# Altium PCB Dash.PcbDoc
Units mil, origin at the board's own origin, x right, y up, seen from the top; angles counter-clockwise.
Board outline 3937.01 x 3149.61 mil, 2 copper layers (Top, Bottom); 18 components, 90 nets, 274 pads, 115 vias.
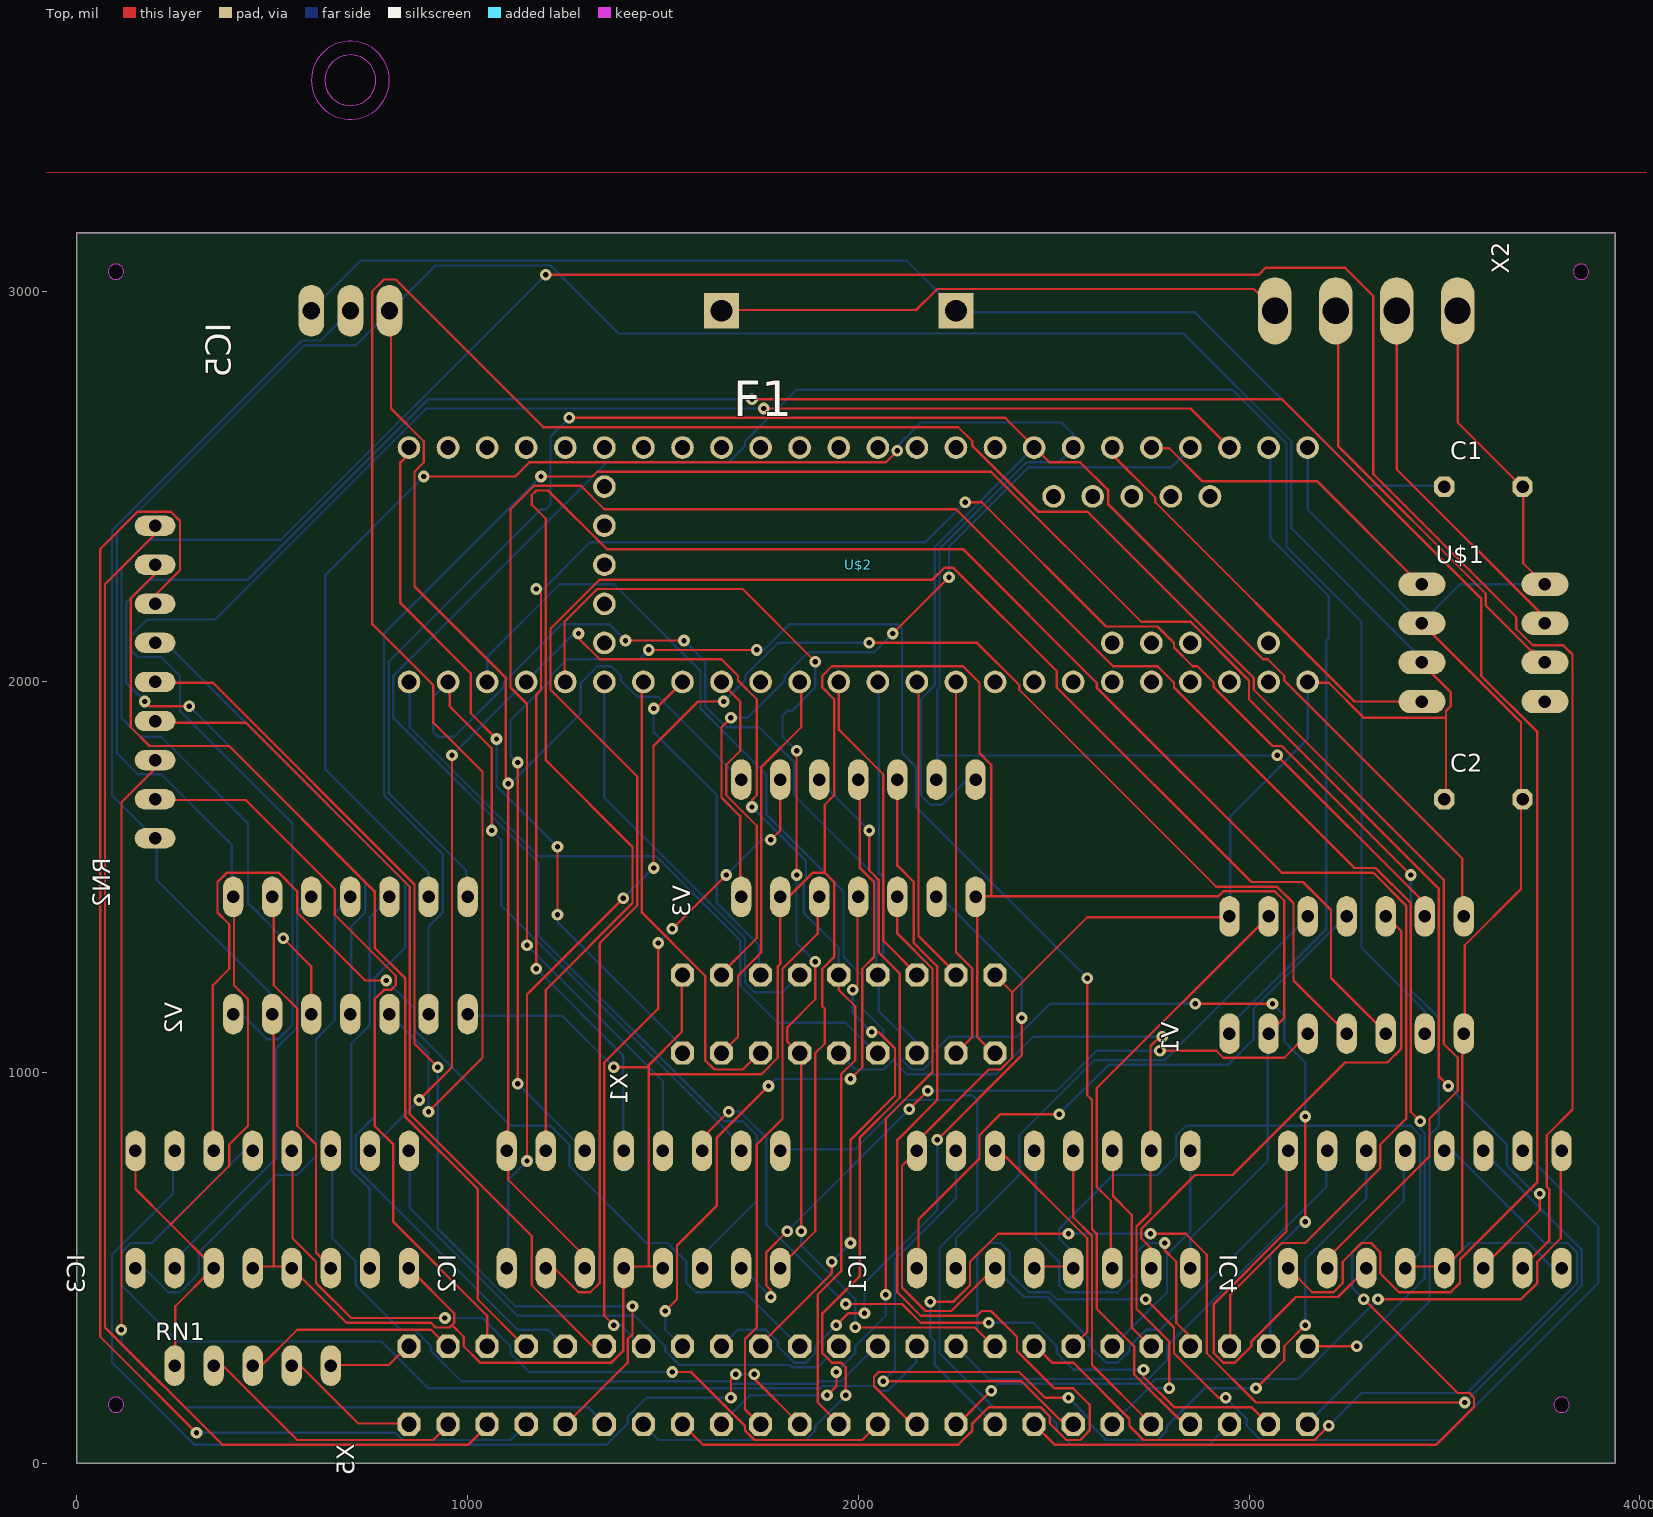
[diagram p0: Top view]
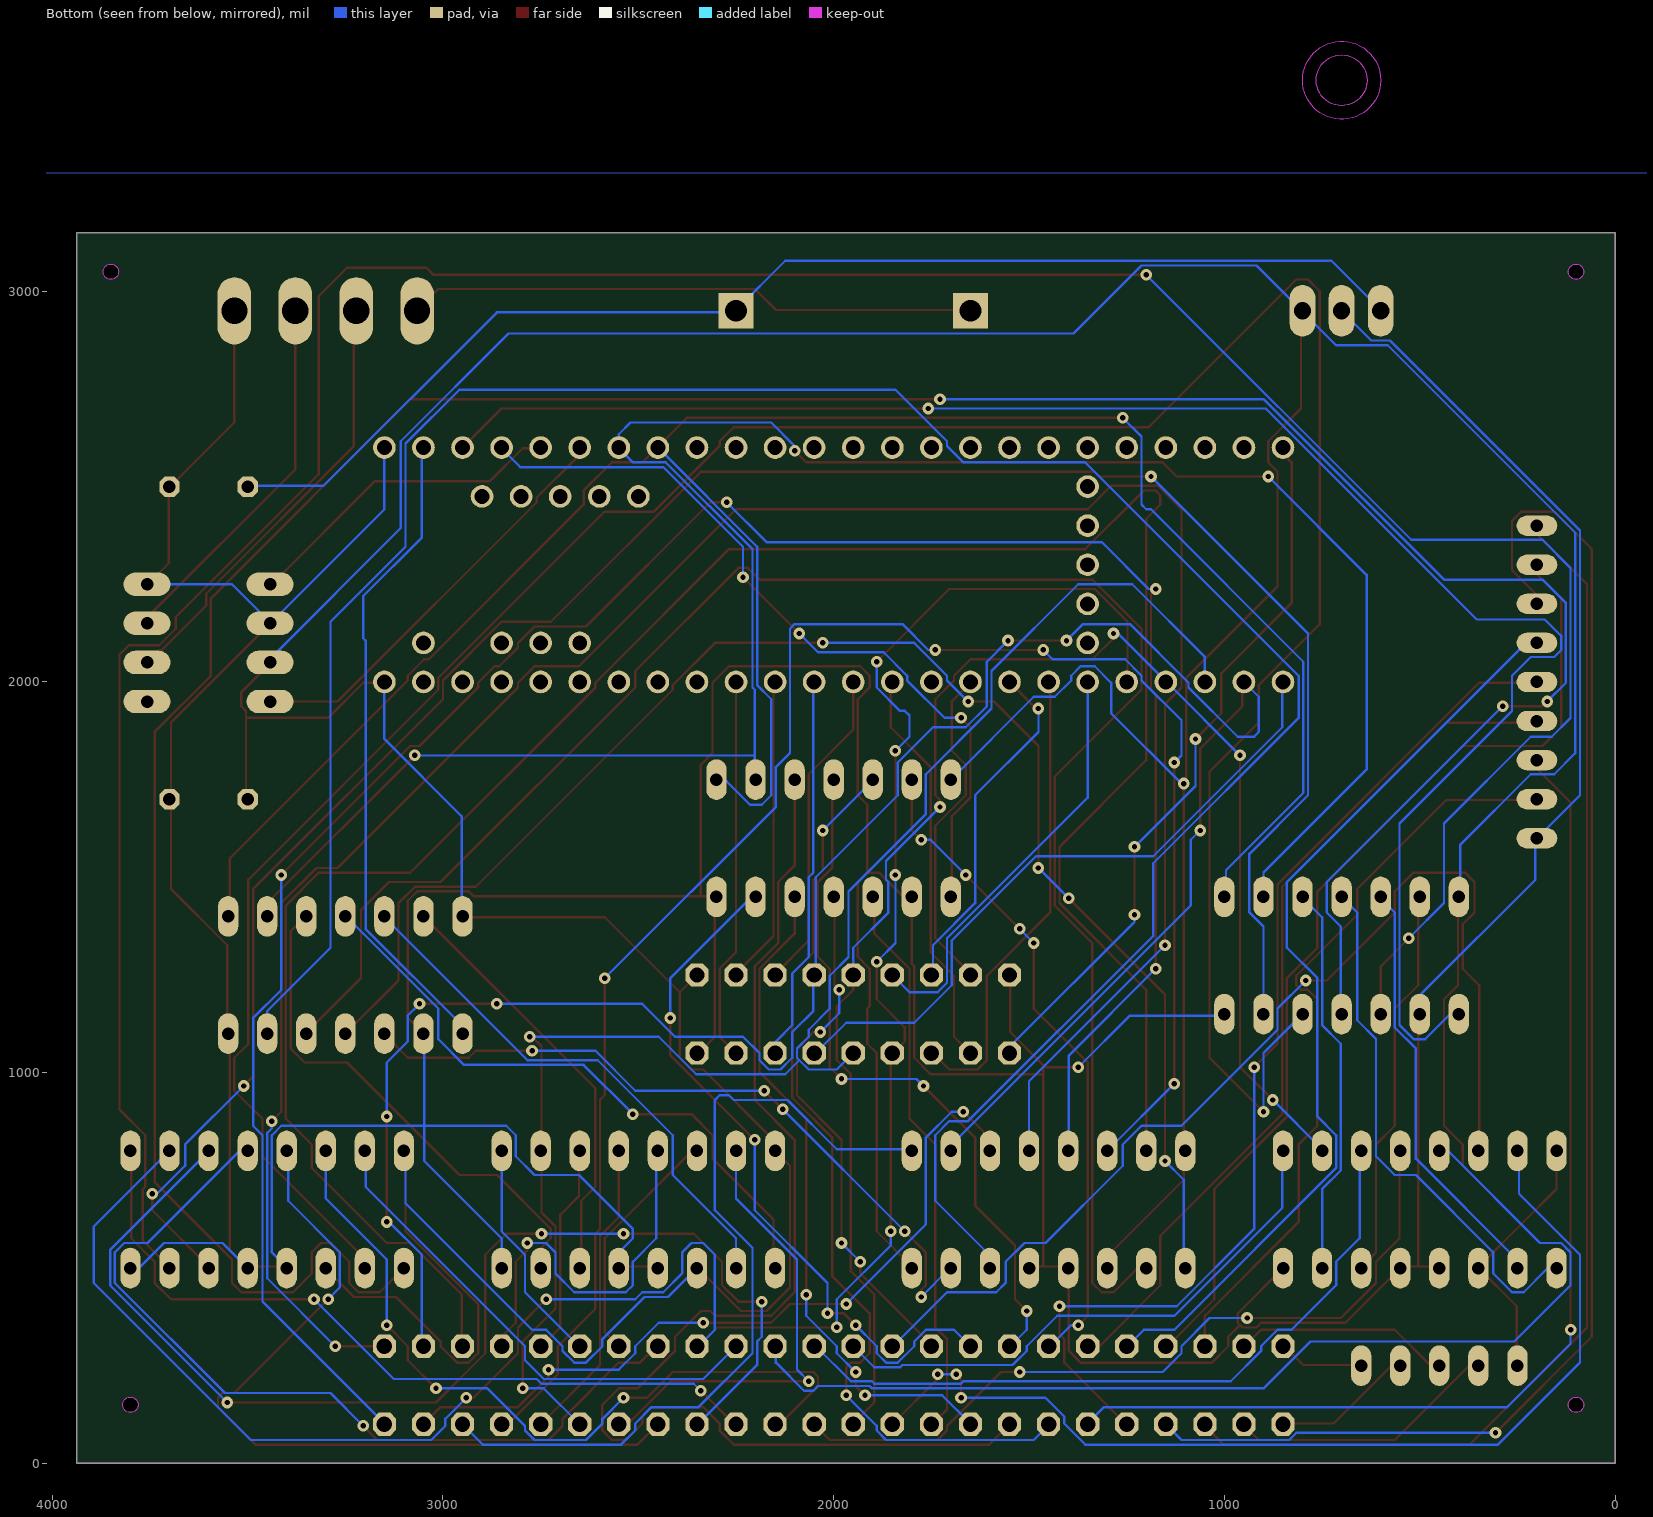
[diagram p1: Bottom view, seen from below]

## Layer stack, top to bottom
Top Solder: solder mask 0.4, Solder Resist, Dk 3.5
Top: signal copper 1.378
Dielectric 1: dielectric 12.6, FR-4, Dk 4.8
Bottom: signal copper 1.378
Bottom Solder: solder mask 0.4, Solder Resist, Dk 3.5

## Board outline
0,3149.61 0,0 3937.01,0 3937.01,3149.61
cut-out: 700,3475 ccw(c700,3540) 765,3540 ccw(c700,3540) 700,3605 ccw(c700,3540) 635,3540 ccw(c700,3540)
cut-out: 3850,3030.32 ccw(c3850,3050) 3869.68,3050 ccw(c3850,3050) 3850,3069.68 ccw(c3850,3050) 3830.32,3050 ccw(c3850,3050)
cut-out: 3800,130.31 ccw(c3800,150) 3819.68,150 ccw(c3800,150) 3800,169.69 ccw(c3800,150) 3780.32,150 ccw(c3800,150)
cut-out: 100,3030.32 ccw(c100,3050) 119.69,3050 ccw(c100,3050) 100,3069.68 ccw(c100,3050) 80.31,3050 ccw(c100,3050)
cut-out: 100,130.31 ccw(c100,150) 119.69,150 ccw(c100,150) 100,169.69 ccw(c100,150) 80.31,150 ccw(c100,150)

## Design rules (kind name [scope] priority, off if disabled: settings)
BoardOutlineClearance mdCopperDimension [All] p1: gap=10 ignorepadtopadclearanceinfootprint=FALSE except(0: Arc-SplitContinuation Track-SplitContinuation SMDPad-SplitContinuation THPad-SplitContinuation Via-SplitContinuation Fill-SplitContinuation Poly-SplitContinuation Region-SplitContinuation Text-SplitContinuation; 40: Poly-OutlineEdge Poly-CavityEdge Poly-CutoutEdge Poly-SplitBarrior)
Clearance "Clearance (Same Net)" [All] p1: gap=6 ignorepadtopadclearanceinfootprint=FALSE
Clearance [All] p2: gap=6 ignorepadtopadclearanceinfootprint=FALSE
HoleSize [All] p1: absolutevalues=TRUE maxlimit=100000 minlimit=13.78 maxpercent=80.000 minpercent=20.000
HoleToHoleClearance mdDrill [All] p1: gap=6 allowstackedmicrovias=TRUE
MinimumSolderMaskSliver [All] p1 off: minsoldermaskwidth=10
PasteMaskExpansion mlMinCreamFrame [All] p1: expansion=0
PolygonConnect PolygonConnect_For_PolygonThermal_ON_Width60000_Gap100000 [InPolygonClass('PolygonThermal_ON_Width60000_Gap100000') vs Not IsVia] p1: connectstyle=Relief reliefconductorwidth=6 reliefentries=4 polygonreliefangle="90 Angle" airgapwidth=10
PolygonConnect ThermalVias [IsVia] p2: connectstyle=Direct reliefconductorwidth=10 reliefentries=4 polygonreliefangle="90 Angle" airgapwidth=10
PolygonConnect [All] p3: connectstyle=Relief reliefconductorwidth=10 reliefentries=4 polygonreliefangle="90 Angle" airgapwidth=10
RoutingVias [All] p1: holewidth=13.78 width=29.78 viastyle="Through Hole" minholewidth=13.78 minwidth=29.78 maxholewidth=100 maxwidth=100
SolderMaskExpansion mlMinStopFrame [All] p1: expansion=4 istentingtop=FALSE
Width [All] p1: maxlimit=10 minlimit=6 preferedwidth=6
26 further rules are at their usual default settings.

## Classes and differential pairs
polygon class PolygonThermal_ON_Width60000_Gap100000: Polygon_1_Net_N$5 Polygon_1_Net_N$6

## Components (designator, comment, footprint, x,y, rotation, side; value= is the part's Value field where it differs from the comment)
C1 "10u" C050-024X044 3600,2500 r0 top
C2 "10u" C050-024X044 3600,1700 r0 top
F1 "FUSEBLANK_5X20MM" FUSE_HOLDER_5X20MM 1650,2950 r0 top
IC1 "74LS47N" DIL16 2500,650 r0 top
IC2 "74LS47N" DIL16 1450,650 r0 top
IC3 "74LS47N" DIL16 500,650 r0 top
IC4 "74LS47N" DIL16 3450,650 r0 top
IC5 "7805T" TO220H 700,3350 r0 top
RN1 "" SIL5 450,250 r0 top
RN2 "200" SIL9 200,2000 r90 top
U$1 "" MCP2561_PDIP 3600,2100 r0 top
U$2 "" TEENSY_3.5/3.6 2050,2300 r180 top
V1 "74164N" DIL14 3250,1250 r0 top
V2 "74164N" DIL14 700,1300 r0 top
V3 "74164N" DIL14 2000,1600 r0 top
X1 "TSW-109-08-G-Q" TSW-109-XX-G-Q 1950,1150 r0 top
X2 "" KK-156-4 3300,2950 r180 top
X5 "TSW-124-08-G-Q" TSW-124-XX-G-Q 2000,200 r0 top

## Footprints (in the part's own frame and the unit in brackets; to place one, negate y for a bottom-side part, rotate by r counter-clockwise, add the part's x,y. Pads: shape width x height; smd on the part's side, far side on the other; paste and mask are expansions set on the pad)
C050-024X044 [mil] "C050-024X044"
  oct 52x52 / inner round 48.04 / far side oct 52x52 hole 32: 1(-100,0) 2(100,0)
  body extent -124,-28 124,28, height 150
DIL14 [mil] "DIL14"
  oval 52x104 hole 32: 1(-300,-150) 2(-200,-150) 3(-100,-150) 4(0,-150) 5(100,-150) 6(200,-150) 7(300,-150) 8(300,150) 9(200,150) 10(100,150) 11(0,150) 12(-100,150) 13(-200,150) 14(-300,150)
  body extent -326,-202 326,202, height 50
DIL16 [mil] "DIL16"
  oval 52x104 hole 32: 1(-350,-150) 2(-250,-150) 3(-150,-150) 4(-50,-150) 5(50,-150) 6(150,-150) 7(250,-150) 8(350,-150) 9(350,150) 10(250,150) 11(150,150) 12(50,150) 13(-50,150) 14(-150,150) 15(-250,150) 16(-350,150)
  body extent -376,-202 376,202, height 50
FUSE_HOLDER_5X20MM [mil] "FUSE_HOLDER_5X20MM"
  rect 90x90 / inner round 83.15 / far side rect 90x90 hole 56: 1(0,0) 2(600,0)
  body extent -42,-42 642,42, height 50
KK-156-4 [mil] "KK-156-4"
  oval 86x172 hole 66.93: 1(-233.86,0) 2(-77.95,0) 3(77.95,0) 4(233.86,0)
  body extent -277,-86 277,86, height 50
MCP2561_PDIP [mil] "MCP2561_PDIP"
  oval 120x60 hole 32: CANH(157.48,50) CANL(157.48,-50) RXD(-157.48,-150) SPLIT(157.48,-150) STBY(157.48,150) TXD(-157.48,150) VDD(-157.48,-50) VSS(-157.48,50)
  body extent -218,-180 218,180, height 50
SIL5 [mil] "SIL5"
  oval 52x104 hole 32: 1(-200,0) 2(-100,0) 3(0,0) 4(100,0) 5(200,0)
  body extent -233,-52 226,52, height 150
SIL9 [mil] "SIL9"
  oval 52x104 hole 32: 1(-400,0) 2(-300,0) 3(-200,0) 4(-100,0) 5(0,0) 6(100,0) 7(200,0) 8(300,0) 9(400,0)
  body extent -433,-52 426,52, height 150
TEENSY_3.5/3.6 [mil] "TEENSY_3.5/3.6"
  round 58 hole 38: 0/RX(-1000,-300) 1/TX(-900,-300) 2(-800,-300) 3/CANTX(-700,-300) 3V3(300,-300) 3V3_2(700,-100) 3V3_LO(-900,300) 4/CANRX(-600,-300) 5(-500,-300) 6(-400,-300) 7(-300,-300) 8(-200,-300) 9/CS(-100,-300) 10/CS(0,-300) 11/MOSI(100,-300) 12/MISO(200,-300) 13/SCK(200,300) 14/A0(100,300) 15/A1(0,300) 16/A2(-100,300) 17/A3(-200,300) 18/A4/SDA(-300,300) 19/A5/SCL(-400,300) 20/A6(-500,300) 21/A7(-600,300) 21/DAC0(500,300) 22/A8(-700,300) 23/A9(-800,300) 24(400,-300) 25(500,-300) 26(600,-300) 27(700,-300) 28(800,-300) 29(900,-300) 30(1000,-300) 31/A12(1100,-300) 32/A13(1200,-300) 33/A14(1200,300) 34/A15(1100,300) 35/A16(1000,300) 36/A17(900,300) 37/A18(800,300) 38/A19(700,300) 39/A20(600,300) A10(-700,200) A11(-600,200) A22/DAC1(400,300) AGND(-1000,300) AREF(-800,200) GND(-1100,-300) GND2(300,300) GND3(700,0) PROG(700,100) RESET(700,200) U5V(-850,-175) UD+(-650,-175) UD-(-750,-175) UGND1(-550,-175) UGND2(-450,-175) VBAT(700,-200) VIN(-1100,300) VUSB(-1000,200)
  body extent -1129,-329 1229,329, height 50
TO220H [mil] "TO220H"
  oval 66x132 hole 44: 1(-100,-400) 2(0,-400) 3(100,-400)
  Top keep-out circle w0: c0,190 r100
  Bottom keep-out circle w0: c0,190 r100
  body extent -133,-466 133,290, height 150
TSW-109-XX-G-Q [mm] "TSW-109-XX-G-Q"
  oct 1.508x1.508 / inner round 1.393 / far side oct 1.508x1.508 hole 1: 1(10.16,-2.54) 2(10.16,2.54) 3(7.62,-2.54) 4(7.62,2.54) 5(5.08,-2.54) 6(5.08,2.54) 7(2.54,-2.54) 8(2.54,2.54) 9(0,-2.54) 10(0,2.54) 11(-2.54,-2.54) 12(-2.54,2.54) 13(-5.08,-2.54) 14(-5.08,2.54) 15(-7.62,-2.54) 16(-7.62,2.54) 17(-10.16,-2.54) 18(-10.16,2.54)
  body extent -10.86,-3.24 10.86,3.24, height 3.81
TSW-124-XX-G-Q [mm] "TSW-124-XX-G-Q"
  oct 1.508x1.508 / inner round 1.393 / far side oct 1.508x1.508 hole 1: 1(29.21,-2.54) 2(29.21,2.54) 3(26.67,-2.54) 4(26.67,2.54) 5(24.13,-2.54) 6(24.13,2.54) 7(21.59,-2.54) 8(21.59,2.54) 9(19.05,-2.54) 10(19.05,2.54) 11(16.51,-2.54) 12(16.51,2.54) 13(13.97,-2.54) 14(13.97,2.54) 15(11.43,-2.54) 16(11.43,2.54) 17(8.89,-2.54) 18(8.89,2.54) 19(6.35,-2.54) 20(6.35,2.54) 21(3.81,-2.54) 22(3.81,2.54) 23(1.27,-2.54) 24(1.27,2.54) 25(-1.27,-2.54) 26(-1.27,2.54) 27(-3.81,-2.54) 28(-3.81,2.54) 29(-6.35,-2.54) 30(-6.35,2.54) 31(-8.89,-2.54) 32(-8.89,2.54) 33(-11.43,-2.54) 34(-11.43,2.54) 35(-13.97,-2.54) 36(-13.97,2.54) 37(-16.51,-2.54) 38(-16.51,2.54) 39(-19.05,-2.54) 40(-19.05,2.54) 41(-21.59,-2.54) 42(-21.59,2.54) 43(-24.13,-2.54) 44(-24.13,2.54) 45(-26.67,-2.54) 46(-26.67,2.54) 47(-29.21,-2.54) 48(-29.21,2.54)
  body extent -29.91,-3.24 29.91,3.24, height 3.81

## Part data
C1 C2: library part C050-024X044, PackageName=C050-024X044
F1: library part FUSE_HOLDER_5X20MM, PackageName=FUSE_HOLDER_5X20MM
IC1 IC2 IC3 IC4: library part DIL16, PackageName=DIL16
IC5: library part TO220H, PackageName=TO220H
RN1: library part SIL5, PackageName=SIL5
RN2: library part SIL9, PackageName=SIL9
U$1: library part MCP2561_PDIP, PackageName=MCP2561_PDIP
U$2: library part TEENSY_3.5/3.6, PackageName=TEENSY_3.5/3.6
V1 V2 V3: library part DIL14, PackageName=DIL14
X1: library part TSW-109-XX-G-Q, PackageName=TSW-109-XX-G-Q
X2: library part KK-156-4, PackageName=KK-156-4
X5: library part TSW-124-XX-G-Q, PackageName=TSW-124-XX-G-Q

## Free pads (board coordinates)
  round 39.37 hole 39.37 unplated: MH1(100,3050) MH2(100,150) MH3(3800,150) MH4(3850,3050)
  round 130 hole 130 unplated: MH1(700,3540)

## Via types
v1: diameter 29.78/29.78 (per signal layer), hole 13.78, Top to Bottom, 115 vias

## Nets (pads, with @x,y where several pads share a name; then routed paths per layer and width w, separated by ;. In a path a pad name is that pad's centre, name@x,y a point inside that pad or via, vN(x,y) a via of type N, cw(c..) or ccw(c..) an arc to the next point about the centre after c; other vN are vias at no path point)
+5V: C2.1 IC1.3 IC1.16 IC2.3 IC2.16 IC3.3 IC3.16 IC4.3 IC4.16 IC5.3 RN1.1 U$1.VDD U$2.VIN V1.14 V2.14 V3.14 X1.2 | length 16091.1
  Top w6: IC3.16 150,702 240,612 ; RN1.1 252,252 252,402 IC3.3 348,504 240,612 ; V2.14 402,1446 402,1224 438,1188 438,864 390,816 390,762 240,612 ; IC5.3 804,2946 804,2700 888,2616 888,2562 864,2538 864,2244 1098,2010 1098,1746 v1(1104,1740) 1104,804 IC2.16 1104,798 1104,726 1296,534 1296,504 IC2.3 ; IC1.3 2346,498 2238,390 2172,390 2112,450 2112,762 IC1.16 2154,804 2154,828 2334,1008 2364,1008 2394,1038 2394,1206 ; X1.2 2394,1206 ; V1.14 2946,1398 2586,1398 2394,1206 ; IC4.16 3096,798 3096,594 2910,408 2910,282 2934,258 2964,258 3006,300 3006,312 3120,426 3228,426 3300,498 IC4.3 ; U$2.VIN 3150,1998 3204,1998 3294,1908 3504,1908 ; U$1.VDD 3444,2046 3516,1974 3516,1938 3504,1926 3504,1908 ; C2.1 3504,1704 3504,1908
  Bottom w6: V2.14 396,1452 396,1584 216,1764 156,1764 102,1818 102,2382 582,2862 714,2862 798,2946 IC5.3 804,2952 918,3066 1212,3066 1386,2892 2832,2892 3108,2616 3108,2394 3438,2064 3438,2052 U$1.VDD ; v1(1104,1740) 1110,1740 1290,1920 1290,1998 1332,2040 1368,2040 1392,2016 1392,2004 1434,1962 1488,1962 V3.14 ; IC1.3 2424,426 2484,426 2592,318 2592,300 2634,258 2664,258 2694,288 2694,300 2736,342 2772,342 3096,666 3096,798 IC4.16 ; V1.14 2952,1404 2952,1656 3150,1854 U$2.VIN
+12V: C1.1 F1.2 IC5.1 | length 3197.1
  Bottom w6: IC5.1 600,2952 726,3078 2124,3078 2250,2952 F1.2 2250,2946 2862,2946 3306,2502 3498,2502 C1.1
A1: IC2.13 X5.1 | length 5854.5
  Top w6: v1(1176,1266) 1176,1968 1188,1980 1188,2226 v1(1176,2238) ; v1(2274,2460) 2316,2460 2634,2142 2766,2142 2808,2100 2808,2088 2856,2040 2868,2040 2910,1998 2910,1986 3060,1836 3084,1836 v1(3414,1506)
  Bottom w6: v1(1176,1266) 1398,1044 1398,804 IC2.13 ; v1(1176,2238) 1194,2238 1314,2358 2172,2358 v1(2274,2460) ; X5.1 3150,102 3462,414 3462,840 3486,864 3486,1140 3414,1212 v1(3414,1506)
A2: IC1.13 X5.8 | length 1023.9
  Top w6: v1(2784,564) 2784,546 2814,516 2814,360 2850,324 X5.8
  Bottom w6: IC1.13 2454,798 2454,576 2514,516 2514,456 2532,438 2664,438 2712,486 2712,540 2736,564 v1(2784,564)
A3: IC3.13 X5.22 | length 2753.5
  Bottom w6: IC3.13 450,798 426,798 192,564 138,564 114,540 114,456 258,312 780,312 900,192 1902,192 1908,198 2040,198 2052,186 2076,186 2148,258 2148,300 X5.22
A4: IC4.13 X5.15 | length 2047.3
  Top w6: X5.15 2502,48 3480,48 3576,144 3576,168 3564,180 3534,180 v1(3294,420)
  Bottom w6: v1(3294,420) 3264,450 3264,540 3396,672 3396,798 IC4.13
A/VEE: U$2.13/SCK X1.15 | length 1037
  Top w6: X1.15 1692,1092 1692,1248 1752,1308 1752,1782 1854,1884 1854,1998 U$2.13/SCK
B1: IC2.12 X5.2 | length 5928.8
  Top w6: v1(1152,1326) 1152,1944 1110,1986 1110,2442 1170,2502 1290,2502 1350,2442 2250,2442 2652,2040 2766,2040 2808,1998 2808,1986 3270,1524 3324,1524 3414,1434 3414,900 v1(3438,876) ; X5.2 v1(3276,300)
  Bottom w6: v1(1152,1326) 1500,978 IC2.12 ; v1(3276,300) 3450,474 3450,846 3438,858 v1(3438,876)
B2: IC1.12 X5.9 | length 782.8
  Top w6: IC1.12 2550,630 2598,582 2598,252 X5.9
B3: IC3.12 X5.23 | length 2002.3
  Top w6: IC3.12 552,798 552,576 612,516 612,462 702,372 v1(942,372) ; v1(1524,234) 1572,234 1710,96 1710,84 1734,60 2010,60 X5.23
  Bottom w6: v1(942,372) 1038,372 1110,300 1110,282 1158,234 v1(1524,234)
B4: IC4.12 X5.16 | length 2191.8
  Top w6: X5.16 2454,300 2496,258 2550,258 2694,114 2694,96 2730,60 3168,60 v1(3204,96)
  Bottom w6: v1(3204,96) 3288,180 3558,180 3840,462 3840,540 3816,564 3756,564 3522,798 3504,798 IC4.12
B.L.: U$2.A22/DAC1 X1.16 | length 854.4
  Top w6: X1.16 1650,1254 1740,1344 1740,1632 1662,1710 1662,1788 1698,1824 1698,1950 1650,1998 U$2.A22/DAC1
C1: IC2.11 X5.3 | length 1992.3
  Top w6: IC2.11 1602,804 1602,834 v1(1668,900) ; v1(1968,408) 2112,408 2160,360 v1(2334,360) ; v1(2730,240) 2730,222 2808,144 3006,144 X5.3
  Bottom w6: v1(1668,900) 1698,900 1764,834 1764,612 v1(1968,408) ; v1(2334,360) 2448,360 2508,300 2508,282 2550,240 v1(2730,240)
C2: IC1.11 X5.10 | length 542.6
  Top w6: IC1.11 2652,798 2652,684 2700,636 2700,348 2748,300 X5.10
C3: IC3.11 X5.24 | length 1858.5
  Bottom w6: IC3.11 654,798 654,576 714,516 714,456 828,342 864,342 906,300 906,288 984,210 1668,210 1674,204 1896,204 1902,210 1956,210 2046,300 X5.24
C4: IC4.11 X5.17 | length 3058
  Top w6: v1(2184,414) 2244,414 2286,456 2286,516 2358,588 v1(2538,588) ; v1(2748,588) 2838,588 2892,534 2892,282 3018,156 v1(3552,156)
  Bottom w6: v1(2184,414) 2184,324 2196,312 2196,252 2346,102 X5.17 ; v1(2538,588) v1(2748,588) ; v1(3552,156) 3852,456 3852,546 3600,798 IC4.11
CAN_H: U$1.CANH X2.2 | length 956.8
  Top w6: X2.2 3378,2946 3378,2544 3756,2166 3756,2154 U$1.CANH
CAN_L: U$1.CANL X2.3 | length 1125.9
  Top w6: X2.3 3228,2946 3228,2604 3606,2226 3606,2196 3720,2082 3726,2082 3756,2052 U$1.CANL
CLK: U$2.6 V1.8 V2.8 V3.8 | length 5627.7
  Top w6: v1(1260,2676) 2376,2676 2448,2604 U$2.6 2454,2598 2490,2562 2568,2562 2640,2490 2640,2454 3036,2058 3048,2058 3090,2016 3090,2004 3546,1548 3546,1404 V1.8
  Bottom w6: V2.8 996,1452 996,1518 798,1716 798,2052 1188,2442 1200,2442 1212,2454 1212,2628 v1(1260,2676) ; V3.8 2298,1746 2274,1746 2214,1686 2184,1686 2160,1710 2160,1956 2196,1992 2196,2346 U$2.6
CONTRAST: U$2.17/A3 X1.3 | length 984.8
  Top w6: X1.3 2292,1092 2292,1266 2250,1308 U$2.17/A3
D0: U$2.33/A14 X1.7 | length 1727.1
  Bottom w6: U$2.33/A14 852,1998 852,1884 1182,1554 1482,1554 1698,1338 1698,1224 1794,1128 1968,1128 2046,1050 X1.7
D1: IC2.10 U$2.34/A15 X1.8 X5.4 | length 5793.5
  Top w6: U$2.34/A15 954,1998 954,1938 1062,1830 v1(1062,1620) ; v1(1404,2106) v1(1554,2106) ; v1(2862,1176) v1(3060,1176) ; v1(3144,618) v1(3144,888)
  Bottom w6: U$2.34/A15 912,1962 912,1872 924,1860 966,1860 1092,1986 1092,1998 1242,2148 1362,2148 v1(1404,2106) ; v1(1062,1620) 1086,1596 1086,1428 1698,816 1698,804 IC2.10 ; v1(1554,2106) 1608,2052 1608,1938 1662,1884 1746,1884 1836,1794 1836,1710 2046,1500 2046,1254 X1.8 2052,1248 2052,1158 2106,1104 2106,1038 2136,1008 2166,1008 2190,1032 2190,1050 2232,1092 2406,1092 2490,1176 v1(2862,1176) ; X5.4 3054,300 3054,534 3138,618 v1(3144,618) ; v1(3060,1176) 3090,1146 3090,1080 3144,1026 v1(3144,888)
D2: IC1.10 U$2.35/A16 X1.9 X5.11 | length 4044.8
  Top w6: v1(2778,1092) 2772,1092 2748,1068 2748,804 IC1.10 2748,798 2748,642 2712,606 2712,396 2796,312 v1(2796,192)
  Bottom w6: U$2.35/A16 1050,2064 1236,2250 1374,2250 1596,2028 1596,1932 1764,1764 1764,1662 1962,1464 1962,1296 2010,1248 2010,1164 2064,1110 2064,1092 2094,1062 2094,1038 2088,1032 ; X1.9 1992,1008 2064,1008 2088,1032 ; X5.11 2742,192 v1(2796,192) ; v1(2778,1092) 2448,1092 2352,996 2124,996 2088,1032
D3: IC3.10 U$2.36/A17 X1.10 X5.25 | length 4129.8
  Top w6: v1(876,930) 960,1014 v1(960,1812) ; v1(1284,2124) 1284,2112 1338,2058 1650,2058 1692,2016 1692,2004 1740,1956 1740,1710 1728,1698 v1(1728,1680) ; X5.25 1950,102 1896,156 1896,432 1956,492 1956,996 1992,1032 1992,1170 1950,1212 X1.10
  Bottom w6: IC3.10 750,804 v1(876,930) ; v1(960,1812) 1146,1998 U$2.36/A17 1152,2004 1272,2124 v1(1284,2124) ; v1(1728,1680) 1866,1542 1866,1494 1860,1488 1860,1410 1950,1320 X1.10
D4: IC4.10 U$2.37/A18 X1.11 X5.18 | length 5904.5
  Top w6: U$2.37/A18 1248,2004 1248,2154 1332,2238 1704,2238 v1(1890,2052) ; v1(1842,1506) v1(1842,1824) ; v1(1854,594) 1854,1050 X1.11 1848,1050 1818,1080 1818,1116 1890,1188 v1(1890,1284) ; v1(1992,348) 2298,348 2346,300 X5.18 ; v1(2736,420) 2808,348 2808,282 2922,168 v1(2940,168)
  Bottom w6: v1(1842,1506) 1842,1332 v1(1890,1284) ; v1(1842,1824) 1806,1860 1806,1914 1818,1926 1830,1926 1890,1986 v1(1890,2052) ; v1(1854,594) 1854,558 1992,420 v1(1992,348) ; X5.18 2346,300 2304,342 2304,534 2334,564 2364,564 2388,540 2388,486 2436,438 2490,438 2508,420 v1(2736,420) ; v1(2940,168) 2994,114 2994,96 3030,60 3492,60 3894,462 3894,606 IC4.10
D5: U$2.38/A19 X1.12 | length 1087.3
  Bottom w6: U$2.38/A19 1350,1704 1710,1344 1710,1230 1734,1206 1806,1206 X1.12
D6: U$2.39/A20 X1.13 | length 1206.9
  Top w6: U$2.39/A20 1446,1998 1446,1410 1608,1248 1608,1032 1632,1008 1704,1008 1746,1050 X1.13
D7: U$2.21/DAC0 X1.14 | length 897.7
  Top w6: v1(1476,1932) 1482,1932 U$2.21/DAC0
  Bottom w6: v1(1476,1932) 1476,1872 1638,1710 1638,1434 1746,1326 1746,1254 X1.14
E1: IC2.9 X5.5 | length 2128.9
  Bottom w6: IC2.9 1800,804 1992,804 2118,930 2256,930 2268,942 2292,942 2304,930 2304,648 2208,552 2208,282 2346,144 2466,144 2508,102 2508,84 2544,48 2898,48 X5.5
E2: IC1.9 X5.12 | length 584
  Bottom w6: X5.12 2652,300 2790,438 2790,534 2850,594 IC1.9
E3: IC3.9 X5.26 | length 1443.2
  Bottom w6: IC3.9 852,798 852,654 1128,378 1428,378 1506,300 1506,288 1542,252 1824,252 1830,246 1896,246 X5.26
E4: IC4.9 X5.19 | length 2007.3
  Top w6: X5.19 2250,96 v1(2340,186) ; v1(3330,420) 3696,420 3738,462 3738,516 3798,576 3798,798 IC4.9
  Bottom w6: v1(2340,186) 2358,204 2748,204 2760,216 3126,216 v1(3330,420)
ENABLE: U$2.14/A0 X1.6 | length 832.5
  Top w6: U$2.14/A0 1950,1878 2064,1764 2064,1338 2148,1254 X1.6
F1: IC2.15 X5.6 | length 5918.3
  Top w6: IC2.15 1200,1212 1422,1434 1422,1578 1200,1800 1200,2418 1164,2454 1164,2478 1176,2490 1206,2490 1356,2340 2268,2340 2610,1998 2610,1986 3084,1512 3318,1512 3402,1428 3402,882 3336,816 3336,756 3144,564 3084,564 2952,432 2952,300 X5.6
F2: IC1.15 X5.13 | length 1199.8
  Top w6: v1(2064,210) 2418,210 2526,102 2550,102 X5.13
  Bottom w6: v1(2064,210) 2094,240 2094,522 2250,678 IC1.15
F3: IC3.15 X5.27 | length 2629.3
  Top w6: v1(1674,168) 1674,216 v1(1686,228) ; v1(1734,228) 1734,216 X5.27
  Bottom w6: IC3.15 246,798 246,690 90,534 90,258 300,48 1356,48 1410,102 1410,120 1458,168 v1(1674,168) ; v1(1686,228) v1(1734,228)
F4: IC4.15 X5.20 | length 1300.5
  Bottom w6: X5.20 2334,216 2742,216 2790,264 2790,300 3198,708 3198,798 IC4.15
G1: IC2.14 X5.7 | length 4648.8
  Top w6: v1(1128,972) v1(1128,1794) ; v1(1464,2082) v1(1740,2082) ; v1(2586,1242) 2586,942 2598,930 2598,600 2610,588 2610,396 2706,300 2706,228 2832,102 2850,102 X5.7
  Bottom w6: v1(1128,972) IC2.14 ; v1(1128,1794) 1110,1812 1110,1902 1212,2004 1212,2016 1254,2058 1440,2058 v1(1464,2082) ; v1(1740,2082) 1758,2082 1824,2148 2100,2148 2112,2136 2112,1818 2148,1782 2148,1680 v1(2586,1242)
G2: IC1.14 X5.14 | length 619.7
  Top w6: IC1.14 2352,798 2364,798 2586,576 2586,336 X5.14
G3: IC3.14 X5.28 | length 2846.8
  Top w6: IC3.14 348,804 348,1224 390,1266 390,1380 360,1410 360,1488 384,1512 516,1512 564,1464 564,1410 738,1236 v1(792,1236)
  Bottom w6: v1(792,1236) 864,1164 864,1110 1110,864 1212,864 1260,816 1260,762 1458,564 1512,564 1560,516 1560,462 1584,438 1710,438 1848,300 X5.28
G4: IC4.14 X5.21 | length 2023.2
  Top w6: X5.21 2148,102 2136,102 2040,198 2040,222 2052,234 2412,234 2478,168 v1(2538,168) ; v1(3018,192) 3090,264 3090,300 v1(3144,354)
  Bottom w6: v1(2538,168) 2592,114 2592,102 2634,60 2766,60 2790,84 2790,96 2886,192 v1(3018,192) ; v1(3144,354) 3144,522 3300,678 IC4.14
GND: C1.2 C2.2 IC1.4 IC1.5 IC1.8 IC2.4 IC2.5 IC2.8 IC3.4 IC3.5 IC3.8 IC4.4 IC4.5 IC4.8 IC5.2 RN2.1 U$1.STBY U$1.VSS U$2.GND V1.2 V1.7 V2.2 V2.7 V3.2 V3.7 X1.1 X1.18 X2.1 | length 17243.2
  Top w6: IC3.4 450,504 504,504 ; V2.2 504,1146 504,504 ; IC3.8 966,384 966,360 960,354 ; v1(1374,1014) 1464,1014 ; IC2.5 1500,504 1464,504 ; X1.18 1548,1248 1548,1104 1464,1020 1464,1014 ; IC2.8 1800,504 1890,594 1890,1050 1914,1074 1914,1164 1908,1170 1908,1266 1938,1296 1938,1488 1914,1512 ; X1.1 2346,1050 2304,1092 2304,1446 V3.7 2304,1452 2340,1452 ; IC1.4 2454,504 2550,504 IC1.5 ; V1.2 3090,1140 3090,1440 3066,1464 2934,1464 2922,1452 2340,1452 ; IC4.4 3402,504 3498,504 IC4.5 3546,546 3546,1098 V1.7 3552,1104 3552,1326 3696,1470 3696,1698 C2.2 3696,1704 3696,1896 3444,2148 U$1.VSS ; X2.1 3534,2946 3534,2664 3696,2502 C1.2 3702,2496 3702,2304 3756,2250 U$1.STBY ; 504,504 546,504 IC3.5 690,360 906,360 918,348 954,348 960,354 ; 960,354 990,324 990,300 1032,258 1368,258 1398,288 1398,498 IC2.4 1404,504 1464,504 ; 1464,504 1464,996 ; 1464,996 1752,996 1794,1038 1794,1272 1800,1278 V3.2 1800,1452 1824,1452 1884,1512 1914,1512 ; 1464,996 1464,1014 ; 1914,1512 1914,1686 1938,1710 1938,1956 1908,1986 1908,2016 1932,2040 2268,2040 2310,1998 2310,1818 2340,1788 2340,1452
  Bottom w6: V2.2 498,1152 498,1200 204,1494 204,1596 RN2.1 90,1710 90,2388 576,2874 624,2874 IC5.2 ; V2.7 1002,1146 1242,1146 v1(1374,1014) ; IC1.5 2550,540 2514,576 2514,600 2652,738 2766,738 2814,786 2814,840 2838,864 3048,864 ; IC1.8 2850,576 3048,774 3048,864 ; V1.2 3048,1098 3048,864 ; U$2.GND 3150,2442 3438,2154 U$1.VSS 3444,2154 3540,2250 U$1.STBY ; IC4.4 3402,504 3438,540 3438,840 3414,864 3048,864 ; IC4.5 3564,564 3714,564 3774,504 3798,504 IC4.8
N$1: RN2.6 X5.40 | length 2402.6
  Bottom w6: RN2.6 228,2100 840,1488 840,1320 762,1242 762,888 714,840 714,756 1128,342 1206,342 1248,300 X5.40
N$2: V3.4 X5.30 | length 1358.9
  Top w6: X5.30 1746,300 1932,486 v1(1932,516) ; v1(1980,564) 1980,828 2094,942 2094,1062 2052,1104 v1(2034,1104) ; v1(1986,1212) 1998,1224 1998,1446 V3.4
  Bottom w6: v1(1932,516) v1(1980,564) ; v1(1986,1212) 1986,1152 v1(2034,1104)
N$3: V3.5 X5.31 | length 1726.9
  Top w6: v1(1920,174) 1944,198 v1(1944,234) ; v1(2070,432) 2070,882 2190,1002 2190,1266 2100,1356 V3.5
  Bottom w6: X5.31 1650,102 1722,174 v1(1920,174) ; v1(1944,234) 1992,282 1992,300 2070,378 v1(2070,432)
N$4: V3.6 X5.32 | length 1817.4
  Top w6: v1(1944,354) 1974,384 v1(2016,384) ; v1(2202,828) 2418,1044 v1(2418,1140)
  Bottom w6: X5.32 1692,342 1764,342 1794,312 1794,300 1836,258 1866,258 1890,282 1890,300 v1(1944,354) ; v1(2016,384) 2016,462 2202,648 v1(2202,828) ; V3.6 2202,1446 2214,1446 2418,1242 v1(2418,1140)
N$5: 
N$6: 
N$7: V3.10 X5.33 | length 3273.9
  Top w6: X5.33 1602,48 2256,48 2292,84 2292,102 2334,144 2466,144 2490,120 2490,102 2532,60 2568,60 2592,84 2592,150 2550,192 2502,192 2406,288 2406,324 2340,390 2316,390 2304,378 2160,378 2100,438 2100,828 2202,930 2202,1272 2142,1332 2142,1488 2100,1530 V3.10
N$8: V3.11 X5.34 | length 1819.6
  Top w6: v1(1506,390) 1536,420 1536,558 1638,660 1638,834 v1(1770,966) ; v1(1980,984) 2010,1014 2010,1266 2040,1296 2040,1488 2004,1524 2004,1746 V3.11
  Bottom w6: v1(1506,390) 1506,342 1548,300 X5.34 ; v1(1770,966) 1788,984 v1(1980,984)
N$9: V3.12 X5.35 | length 2371.5
  Top w6: v1(1968,174) 1968,246 1956,258 1932,258 1908,282 1908,384 2004,480 2004,834 2106,936 2106,1254 2052,1308 2052,1494 2028,1518 v1(2028,1620)
  Bottom w6: X5.35 1452,96 1488,60 1866,60 1890,84 1890,96 v1(1968,174) ; V3.12 1902,1746 v1(2028,1620)
N$10: V3.13 X5.36 | length 1704.8
  Top w6: v1(1374,354) 1350,378 1350,1026 1488,1164 v1(1488,1332) ; v1(1524,1368) v1(1662,1506) ; v1(1776,1596) 1800,1620 V3.13
  Bottom w6: v1(1374,354) 1392,354 1446,300 X5.36 ; v1(1488,1332) v1(1524,1368) ; v1(1662,1506) 1752,1596 v1(1776,1596)
N$11: RN2.5 X5.39 | length 2739.1
  Top w6: RN2.5 204,1998 348,1998 864,1482 864,1074 v1(924,1014) ; X5.39 1254,102 1410,258 1410,318 1422,330 v1(1422,402)
  Bottom w6: v1(924,1014) 924,600 1122,402 v1(1422,402)
N$12: RN2.4 X5.38 | length 2227.5
  Top w6: RN2.4 204,1896 432,1896 852,1476 852,894 1164,582 1164,456 1320,300 X5.38
N$13: RN2.3 X5.37 | length 2853.3
  Top w6: v1(114,342) 114,1692 198,1776 198,1800 RN2.3
  Bottom w6: v1(114,342) 114,306 276,144 1308,144 1350,102 X5.37
N$14: RN2.7 X5.41 | length 3725
  Top w6: RN2.7 204,2202 204,2226 264,2286 264,2412 240,2436 156,2436 60,2340 60,324 v1(306,78)
  Bottom w6: v1(306,78) 816,78 834,60 1110,60 X5.41
N$15: RN2.8 X5.42 | length 2566.7
  Top w6: RN2.8 198,2298 198,2274 138,2214 138,1884 186,1836 390,1836 762,1464 762,1320 840,1242 840,888 1026,702 1026,420 1146,300 X5.42
N$16: RN2.9 X5.43 | length 3232.3
  Top w6: RN2.9 198,2400 198,2376 72,2250 72,348 372,48 1002,48 1050,96 X5.43
N$17: RN2.2 X5.44 | length 1941.7
  Top w6: RN2.2 204,1698 432,1698 660,1470 660,1404 816,1248 816,1224 804,1212 786,1212 762,1188 762,864 810,816 810,618 1050,378 X5.44
N$18: U$2.32/A13 X1.17 | length 1860.2
  Top w6: U$2.32/A13 846,2598 846,2580 828,2562 828,2202 1008,2022 1008,1920 v1(1074,1854) ; v1(1230,1404) v1(1230,1578)
  Bottom w6: v1(1074,1854) 1074,1734 v1(1230,1578) ; v1(1230,1404) 1230,1386 1548,1068 1548,1050 X1.17
N$19: F1.1 X2.4 | length 1464.7
  Top w6: F1.1 1650,2952 2148,2952 2202,3006 3012,3006 3066,2952 X2.4
N$20: RN1.2 X5.45 | length 696.1
  Top w6: RN1.2 354,246 378,246 564,60 912,60 948,96 X5.45
N$21: RN1.3 X5.46 | length 556.7
  Top w6: RN1.3 450,252 474,252 564,342 906,342 948,300 X5.46
N$22: RN1.4 X5.47 | length 362.6
  Top w6: RN1.4 552,246 576,246 720,102 846,102 X5.47
N$23: RN1.5 X5.48 | length 220.4
  Top w6: RN1.5 654,252 798,252 846,300 X5.48
N$31: IC4.7 V2.3 | length 7729.5
  Top w6: v1(528,1344) 600,1272 V2.3 ; v1(1200,3042) 3024,3042 3042,3060 3246,3060 3318,2988 3318,2532 3684,2166 3684,2136 3726,2094 3804,2094 3828,2070 3828,906 3762,840 3762,708 3768,702 3768,570 3702,504 IC4.7
  Bottom w6: v1(528,1344) 438,1434 438,1638 216,1860 162,1860 114,1908 114,2292 186,2364 522,2364 v1(1200,3042)
N$32: IC4.1 V2.4 | length 7813.4
  Top w6: v1(174,1950) 186,1938 v1(288,1938) ; v1(1728,2724) 3084,2724 3594,2214 3594,2016 3738,1872 3738,720 3540,522 3540,462 3516,438 3384,438 3336,486 3336,540 3312,564 3288,564 3240,516 3240,462 3216,438 3162,438 IC4.1
  Bottom w6: v1(174,1950) 126,1998 126,2202 186,2262 438,2262 900,2724 v1(1728,2724) ; v1(288,1938) 738,1488 738,1410 702,1374 702,1152 V2.4
N$33: IC4.2 V2.5 | length 7127.9
  Top w6: v1(900,900) 1038,1038 1038,1770 912,1896 912,1992 756,2148 756,3000 786,3030 816,3030 1194,2652 2256,2652 2292,2616 2292,2604 2460,2436 2586,2436 3012,2010 3012,1980 3498,1494 3498,1074 3534,1038 3534,954 3462,882 3462,786 3204,528 3204,504 IC4.2
  Bottom w6: V2.5 900,1050 v1(900,900)
N$34: IC4.6 V2.6 | length 5536.6
  Top w6: v1(1188,2526) 1320,2526 1332,2538 2340,2538 2724,2154 2850,2154 3000,2004 3000,1956 3486,1470 3486,990 v1(3510,966) ; IC4.6 3600,504 3744,648 v1(3744,690)
  Bottom w6: V2.6 900,1374 936,1410 936,1560 786,1710 786,2124 v1(1188,2526) ; v1(3510,966) 3660,816 3660,762 3732,690 v1(3744,690)
N$35: IC3.7 V2.10 | length 1010.1
  Bottom w6: IC3.7 750,702 702,750 702,1074 750,1122 750,1398 798,1446 V2.10
N$37: IC3.2 V2.12 | length 1094.6
  Bottom w6: IC3.2 252,504 252,522 510,780 510,1062 564,1116 564,1410 600,1446 V2.12
N$38: IC3.6 V2.13 | length 1011.8
  Top w6: V2.13 504,1446 504,1224 564,1164 564,864 612,816 612,540 648,504 IC3.6
N$39: IC2.7 V1.3 | length 1859.3
  Top w6: v1(1776,426) 1776,444 1764,456 1764,540 v1(1818,594) ; v1(2130,906) v1(2178,954) ; v1(2772,1056) 2916,1056 2934,1038 3090,1038 3150,1098 V1.3
  Bottom w6: IC2.7 1704,498 v1(1776,426) ; v1(1818,594) v1(2130,906) ; v1(2178,954) 2508,954 2610,1056 v1(2772,1056)
N$40: IC2.1 V1.4 | length 3919.4
  Top w6: v1(1152,774) 1152,1200 v1(1398,1446) ; v1(1476,1524) 1476,1836 1590,1950 v1(1656,1950) ; v1(2028,2100) 2304,2100 2412,1992 2412,1980 2916,1476 3072,1476 3114,1434 3114,1236 V1.4
  Bottom w6: IC2.1 1104,504 1104,726 v1(1152,774) ; v1(1398,1446) v1(1476,1524) ; v1(1656,1950) 1710,2004 1710,2016 1794,2100 v1(2028,2100)
N$41: IC2.2 V1.5 | length 4804.2
  Top w6: IC2.2 1200,498 1224,498 1284,438 1314,438 1338,462 1338,1332 1434,1428 1434,1758 1212,1980 1212,2136 1338,2262 2190,2262 2220,2292 2244,2292 2508,2028 2508,1986 3006,1488 3138,1488 3210,1416 3210,1242 3348,1104 V1.5
N$42: IC2.6 V1.6 | length 6297
  Bottom w6: IC2.6 1602,504 1602,534 1740,672 1740,840 1704,876 1656,876 1182,1350 1182,1536 810,1908 810,2016 1356,2562 1668,2562 1710,2604 1710,2616 1842,2748 2958,2748 3096,2610 3096,2346 3288,2154 3288,1320 3450,1158 V1.6
N$43: IC1.7 V1.10 | length 1323.2
  Top w6: IC1.7 2748,504 2748,552 2724,576 2724,600 2862,738 2958,738 3246,1026 3354,1026 3390,1062 3390,1362 3354,1398 V1.10
N$44: IC1.1 V1.11 | length 1623.6
  Top w6: IC1.1 2154,504 2154,624 2310,780 2310,840 2364,894 v1(2514,894)
  Bottom w6: v1(2514,894) 2640,1020 2946,1020 3012,1086 3012,1164 3246,1398 V1.11
N$45: IC1.2 V1.12 | length 1378.2
  Bottom w6: IC1.2 2250,576 2412,738 2412,840 2604,1032 2784,1032 3150,1398 V1.12
N$46: IC1.6 V1.13 | length 1098.8
  Top w6: IC1.6 2646,504 2646,672 2610,708 2610,960 V1.13
N$47: IC3.1 V2.11 | length 1365.1
  Bottom w6: IC3.1 150,498 174,498 234,438 264,438 312,486 312,540 510,738 564,738 612,786 612,1086 660,1134 660,1410 V2.11
N$56: V3.3 X5.29 | length 1446.1
  Top w6: X5.29 1746,102 1710,138 1710,318 1740,348 1740,816 1806,882 1806,1266 1896,1356 1896,1446 V3.3
R/W': U$2.15/A1 X1.5 | length 992.6
  Bottom w6: U$2.15/A1 2052,1998 2052,1512 2064,1500 2064,1296 2106,1254 2106,1122 2148,1080 2148,1050 X1.5
REG_SEL: U$2.16/A2 X1.4 | length 792.2
  Top w6: U$2.16/A2 2154,1998 2154,1350 2250,1254 X1.4
RST: U$2.5 V1.9 V2.9 V3.9 | length 5545.1
  Top w6: v1(888,2526) 1122,2526 1158,2562 2070,2562 v1(2100,2592) ; v1(3072,1812) 3450,1434 V1.9
  Bottom w6: v1(888,2526) 636,2274 636,1776 900,1512 V2.9 ; v1(2100,2592) 2100,2604 2160,2664 2520,2664 2550,2634 U$2.5 2550,2598 2514,2562 2430,2562 2208,2340 2208,1986 2202,1980 2202,1812 ; V3.9 2202,1752 2202,1812 ; v1(3072,1812) 2202,1812
RXD: U$1.RXD U$2.4/CANRX | length 1079.3
  Top w6: U$2.4/CANRX 2652,2598 2652,2580 2760,2472 2760,2460 3270,1950 U$1.RXD
S1: U$2.0/RX V1.1 | length 1669.5
  Bottom w6: V1.1 2952,1104 2952,1122 3198,1368 3198,2106 3204,2112 3204,2220 3054,2370 3054,2598 U$2.0/RX
S2: U$2.1/TX V2.1 | length 4491.4
  Top w6: v1(1758,2700) 2850,2700 U$2.1/TX
  Bottom w6: V2.1 402,1146 426,1146 486,1086 516,1086 552,1122 552,1638 264,1926 264,2016 216,2064 156,2064 138,2082 138,2118 180,2160 354,2160 894,2700 v1(1758,2700)
S3: U$2.2 V3.1 | length 2005.2
  Top w6: v1(1674,1908) 1650,1884 1650,1704 1698,1656 1698,1452 V3.1 ; v1(2088,2124) v1(2232,2268)
  Bottom w6: v1(1674,1908) 1716,1908 1812,2004 1812,2016 1872,2076 2040,2076 v1(2088,2124) ; v1(2232,2268) 2232,2346 2436,2550 2802,2550 2850,2598 U$2.2
TXD: U$1.TXD U$2.3/CANTX | length 837.1
  Top w6: U$2.3/CANTX 2754,2598 2796,2598 2880,2514 3174,2514 3438,2250 U$1.TXD
pads on no net: U$1.SPLIT U$2.3V3 U$2.3V3_2 U$2.3V3_LO U$2.7 U$2.8 U$2.9/CS U$2.10/CS U$2.11/MOSI U$2.12/MISO U$2.18/A4/SDA U$2.19/A5/SCL U$2.20/A6 U$2.21/A7 U$2.22/A8 U$2.23/A9 U$2.24 U$2.25 U$2.26 U$2.27 U$2.28 U$2.29 U$2.30 U$2.31/A12 U$2.A10 U$2.A11 U$2.AGND U$2.AREF U$2.GND2 U$2.GND3 U$2.PROG U$2.RESET U$2.U5V U$2.UD+ U$2.UD- U$2.UGND1 U$2.UGND2 U$2.VBAT U$2.VUSB

## Polygon pours and split planes (outlines as drawn)
N$5 on Top "Polygon_1_Net_N$5" (solid, remove dead copper, pour order 0): -203,3303 -203,-153 4103,-153 4103,3357.24 4048.76,3303
N$6 on Bottom "Polygon_1_Net_N$6" (solid, remove dead copper, pour order 1): -251.24,3303 -303,3251.24 -303,-153 4103,-153 4103,3303

## Keep-outs
Keep-Out Layer:
  the board outline again, w0

## Silkscreen, mask and mechanical layers (free items; w line width, h text height)
Dimension:
  the board outline again, w0
Measures:
  lines w6: 1950,-250 1950,1150

## Dimensions
800,350 to 0,350 on tFinish
2000,200 to 1950,200 on tFinish
2000,200 to 2000,1150 on tFinish

## Text inside footprints (layer, text, board x,y; h text height)
RN1: tPlace "1" at 160,230 h60.45
RN2: tPlace "1" at 220,1510 h60.45 r90
U$1: tPlace "TXD" at 3401.35,2290.37 h49.6
U$2: tPlace "3.6" at 1943.75,2343.75 h108.5 r180; tPlace "TEENSY" at 1943.75,2256.25 h108.5 r180
X1: tPlace "2" at 2339.84,1307.05 h36.81; tPlace "1" at 2343.78,947.72 h36.81
X5: tPlace "2" at 3139.84,357.05 h36.81; tPlace "1" at 3143.78,-2.28 h36.81